# Altium PCB Motor_Driver_Model_D201.PcbDoc (part 2 of 2)
Units mil, origin at the board's own origin, x right, y up, seen from the top; angles counter-clockwise.
Board outline 1181.1 x 787.4 mil, 4 copper layers (1-SIG-TOP, 2-GND, 3-GND-PWR, 4-SIG-BOT), stack 37.795 mil thick; 50 components, 25 nets, 114 pads, 118 vias.
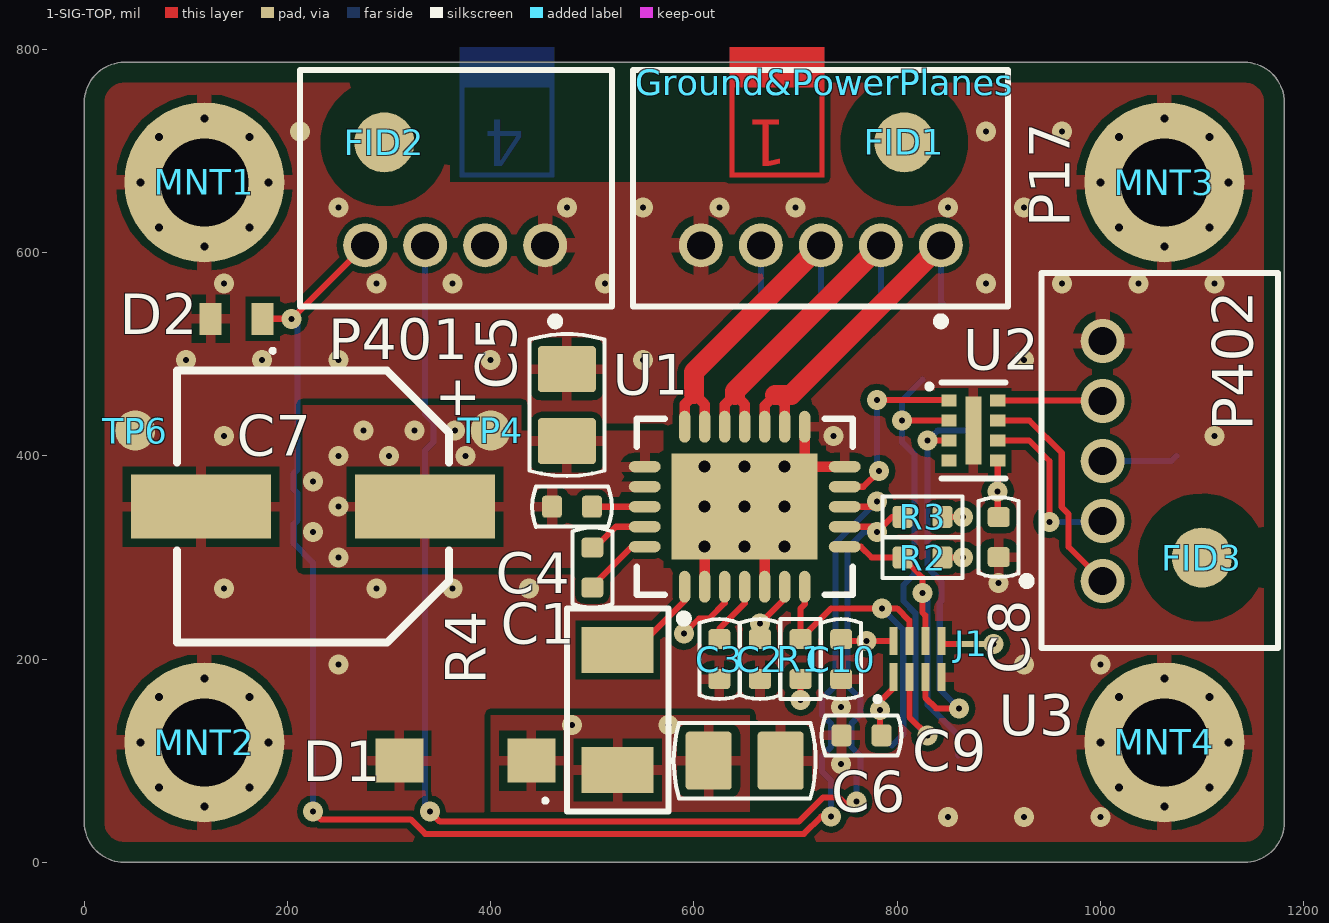
[diagram p0: 1-SIG-TOP view]

## Via types
v1: diameter 19.68, hole 5.91, 1-SIG-TOP to 4-SIG-BOT, tented both sides, 77 vias
v2: diameter 21.65, hole 7.87, 1-SIG-TOP to 4-SIG-BOT, 32 vias
v3: diameter 23.81, hole 11.81, 1-SIG-TOP to 4-SIG-BOT, tented both sides, 9 vias

## Nets (pads, with @x,y where several pads share a name; then routed paths per layer and width w, separated by ;. In a path a pad name is that pad's centre, name@x,y a point inside that pad or via, vN(x,y) a via of type N, cw(c..) or ccw(c..) an arc to the next point about the centre after c; other vN are vias at no path point) (continued)
SPEED: (continued)
  1-SIG-TOP w6: D2.1 v1(204.09,535) P401.4 ; v1(225,50) 232.8,42.2 321.16,42.2 335.35,28 708.32,28 725.32,45 v1(735,45) ; U1.10 775,350 v1(780,355)
  4-SIG-BOT w6: v1(204.09,535) 210,529.09 210,386.65 206.16,382.8 206.16,367.2 210,363.35 210,336.65 206.16,332.8 206.16,313.84 225,295 v1(225,50) ; v1(735,45) 735,80.35 726.16,89.2 726.16,104.8 735,113.65 735,136.35 726.16,145.2 726.16,160.8 739.16,173.8 739.16,314.16 v1(780,355)
VCCA: C8.2 C9.1 J1.1 P402.3 TP2.1 U2.5 U3.1 | length 214.4
  1-SIG-TOP w6: C9.1 780,129.68 783,132.68 v1(783,150) 783,152 780,155 796.38,171.38 U3.1 ; J1.1 v1(895,215) ; U2.5 v1(899.02,365) 899.02,340.67 C8.2
  4-SIG-BOT w6: P402.3 1070,395 TP2.1
VSYS: C4.2 C5.1 C7.1 P401.2 TP4.1 U1.20 U1.21
  other v1: 250,300 225,325 250,350 225,375 250,400 300,400 375,400 275,425 325,425 365,425
pads on no net: FID1. FID2. FID3. U2.4

## Polygon pours and split planes (outlines as drawn)
GND on 1-SIG-TOP "GND_L01_P135" (solid, remove dead copper, pour order 135): 0,787.4 1181.1,787.4 1181.1,0 0,0
VSYS on 1-SIG-TOP "VSYS_L01_P133" (solid, pour order 133): 570,360 480,360 480,290 215,290 215,450 430,450 430,425 570,425
DRV_TP.VREG on 1-SIG-TOP "DRV_TP.VREG_L01_P131" (solid, pour order 131): 400,145 400,50 655,50 655,145
GND on 4-SIG-BOT "GND_L04_P137" (solid, remove dead copper, pour order 137): 0,787.4 1181.1,787.4 1181.1,0 0,0
GND on 2-GND (split plane): 1145.51,767.02 1149.14,765.92 1152.49,764.13 1155.42,761.72 1157.83,758.79 1159.62,755.44 1160.72,751.81 1161.05,748.49 1161.01,748.03 1161.01,39.37 1161.05,38.91 1160.72,35.59 1159.62,31.96 1157.83,28.61 1155.42,25.68 1152.49,23.27 1149.14,21.48 1145.51,20.38 1142.19,20.05 1141.73,20.1 39.37,20.1 38.91,20.05 35.59,20.38 31.96,21.48 28.61,23.27 25.68,25.68 23.27,28.61 21.48,31.96 20.38,35.59 20.05,38.91 20.1,39.37 20.1,748.03 20.05,748.49 20.38,751.81 21.48,755.44 23.27,758.79 25.68,761.72 28.61,764.13 31.96,765.92 35.59,767.02 38.91,767.35 39.37,767.3 369.49,767.3 369.49,669.29 639.76,669.29 644.69,669.29 733.27,669.29 733.27,767.3 1141.73,767.3 1142.19,767.35
GND on 2-GND (split plane): 639.76,674.21 546.26,674.21 546.26,767.3 639.76,767.3
GND on 3-GND-PWR (split plane): 1145.51,767.02 1149.14,765.92 1152.49,764.13 1155.42,761.72 1157.83,758.79 1159.62,755.44 1160.72,751.81 1161.05,748.49 1161.01,748.03 1161.01,39.37 1161.05,38.91 1160.72,35.59 1159.62,31.96 1157.83,28.61 1155.42,25.68 1152.49,23.27 1149.14,21.48 1145.51,20.38 1142.19,20.05 1141.73,20.1 39.37,20.1 38.91,20.05 35.59,20.38 31.96,21.48 28.61,23.27 25.68,25.68 23.27,28.61 21.48,31.96 20.38,35.59 20.05,38.91 20.1,39.37 20.1,748.03 20.05,748.49 20.38,751.81 21.48,755.44 23.27,758.79 25.68,761.72 28.61,764.13 31.96,765.92 35.59,767.02 38.91,767.35 39.37,767.3 369.49,767.3 369.49,669.29 457.68,669.29 551.18,669.29 556.1,669.29 639.76,669.29 644.69,669.29 733.27,669.29 733.27,767.3 1141.73,767.3 1142.19,767.35
VSYS on 3-GND-PWR (split plane): 420.92,304.08 229.08,304.08 229.08,445.92 355,445.92 356.56,446.23 357.88,447.12 358.77,448.44 359.08,450 359.08,645.92 420.92,645.92
DRV_TP.VREG on 3-GND-PWR (split plane): 645.92,150 645.92,79.08 379.08,79.08 379.08,245.92 645.92,245.92
VCCA on 3-GND-PWR (split plane): 1035.92,364.08 950,364.08 948.44,363.77 947.12,362.88 946.23,361.56 945.92,360 945.92,104.08 776.69,104.08 730.77,150 751.69,170.92 875,170.92 876.56,171.23 877.88,172.12 878.77,173.44 879.08,175 879.08,250 879.08,350 879.08,425.92 1035.92,425.92
GND on 3-GND-PWR (split plane): 551.18,674.21 457.68,674.21 457.68,767.3 551.18,767.3
DRV_TP.V3P3 on 3-GND-PWR (split plane): 870.92,250 870.92,179.08 750,179.08 748.44,178.77 747.12,177.88 723.31,154.08 654.08,154.08 654.08,245.92 825,245.92 826.56,246.23 827.88,247.12 828.77,248.44 829.08,250 829.08,345.92 870.92,345.92

## Keep-outs
Keep-Out Layer:
  text "'.Layer_Name'" at 3740.16,98.43 h98.43

## Other copper
1-SIG-TOP:
  text "'.Layer_Name'" at 3740.16,1870.08 h98.43
4-SIG-BOT:
  text "'.Layer_Name'" at 4330.71,1574.8 h98.43
2-GND (plane layer: these items are gaps in the copper):
  text "'.Layer_Name'" at 3740.16,1771.65 h98.43
3-GND-PWR (plane layer: these items are gaps in the copper):
  lines w8: 650,150 650,250 ; 650,150 725,150 ; 650,150 650,75 375,75 375,250 650,250 ; 650,250 825,250 825,350 875,350 ; 725,150 750,175 850,175 875,175 875,250 875,350 ; 725,150 775,100 950,100 950,360 1040,360 1040,430 875,430 875,350 ; 225,300 425,300 425,650 355,650 355,450 225,450 225,300
  text "'.Layer_Name'" at 3740.16,1673.23 h98.43

## Silkscreen, mask and mechanical layers (free items; w line width, h text height)
Top Overlay:
  text "'.Layer_Name'" at 3740.16,98.43 h98.43
Bottom Overlay:
  text "'.Layer_Name'" at 4330.71,0 h98.43
Top Paste:
  text "'.Layer_Name'" at 3740.16,688.98 h98.43
Bottom Paste:
  text "'.Layer_Name'" at 4330.71,590.55 h98.43
Top Solder:
  text "'.Layer_Name'" at 3740.16,492.13 h98.43
Bottom Solder:
  text "'.Layer_Name'" at 4330.71,393.7 h98.43
Drill Guide:
  text "'.Layer_Name'" at 3740.16,196.85 h98.43
Dimensions:
  text "'.Layer_Name'" at 3740.16,1377.95 h98.43
Fiducials:
  text "'.Layer_Name'" at 3740.16,1279.53 h98.43
Outline:
  the board outline again, w39.37
  text "'.Layer_Name'" at 3740.16,1181.1 h98.43
3D Body TOP:
  text "'.Layer_Name'" at 3740.16,1082.68 h98.43
TOP ASSY:
  text "'.Layer_Name'" at 3740.16,688.98 h98.43
Courtyard TOP:
  text "'.Layer_Name'" at 3740.16,984.25 h98.43
PCB Sheet:
  lines w27.56: -2396.85,-8984.25 -2396.85,2708.66 ; -2396.85,-6061.02 -2200,-6061.02 ; -2396.85,-3137.8 -2200,-3137.8 ; -2396.85,-214.57 -2200,-214.57 ; -2200,-7579.25 382.95,-7579.25 1882.95,-7579.25 4886.61,-7579.25 ; -699.72,-8787.4 -699.72,-7579.25 ; -699.72,-8479.25 4886.61,-8479.25 ; -699.72,-8179.25 4886.61,-8179.25 ; -699.72,-7879.25 4886.61,-7879.25 ; 164.96,-8984.25 164.96,-8787.4 ; 164.96,2511.81 164.96,2708.66 ; 1482.95,-8787.4 1482.95,-8179.25 1482.95,-7579.25 ; 2524.41,-8984.25 2524.41,-8787.4 ; 2524.41,2511.81 2524.41,2708.66 ; 3582.95,-8787.4 3582.95,-8179.25 ; 4886.61,-6061.02 5083.46,-6061.02 ; 4886.61,-3137.8 5083.46,-3137.8 ; 4886.61,-214.57 5083.46,-214.57 ; -3184.25,-8984.25 5083.46,-8984.25 5083.46,2708.66 -3184.25,2708.66 -3184.25,-8984.25 ; -2200,-8787.4 -2200,2511.81 4886.61,2511.81 4886.61,-8787.4 -2200,-8787.4
  text "1" at -1018.9,2570.87 h70
  text "2" at 1343.31,2570.87 h70
  text "3" at 3705.51,2570.87 h70
  text "A" at -2318.11,1148.62 h70
  text "A" at 4965.35,1148.62 h70
  text "'.Layer_Name'" at 3740.16,885.83 h98.43
  text "B" at -2318.11,-1774.61 h70
  text "B" at 4965.35,-1774.61 h70
  text "C" at -2318.11,-4697.83 h70
  text "C" at 4965.35,-4697.83 h70
  text "D" at -2318.11,-7542.32 h70
  text "D" at 4965.35,-7542.32 h70
  text "ENGINEER:" at -649.72,-7679.25 h45
  text "PROJECT NAME:" at 1532.95,-7679.25 h45
  text "'.ProjectName'" at 2075.2,-7803.15 h118.11
  text "'._HWEngineer'" at -554.76,-7812.78 h60
  text "PCB DESIGNER:" at -649.72,-7974.25 h45
  text "BOARD NAME:" at 1532.95,-7974.53 h45
  text "'._CompanyName'" at -2003.15,-8039.37 h70
  text "'._BoardName'" at 2075.2,-8108.27 h118.11
  text "'._HWEngineer'" at -559.76,-8117.78 h60
  text "'._address1'" at -2003.15,-8236.22 h70
  text "DATE:" at -649.72,-8279.25 h45
  text "PART NO.:" at 1532.95,-8279.25 h45
  text "Ver:" at 3632.95,-8279.25 h45
  text "'._address2'" at -2003.15,-8334.65 h70
  text "'._Revision'" at 3990.75,-8384.25 h118.11
  text "'._DocumentDate'" at -559.76,-8387.78 h70
  text "'._PCBModel'" at 2075.2,-8413.39 h118.11
  text "'._address3'" at -2003.15,-8433.07 h50
  text "'._address4'" at -2003.15,-8531.5 h50
  text "FILE NAME:" at -649.72,-8579.25 h45
  text "SCH. NO.:" at 1532.95,-8579.25 h45
  text "SCALE:" at 3632.95,-8579.25 h45
  text "A4 M1:1" at 4015.75,-8684.25 h118.11
  text "'.ProjectNumber'" at 2075.2,-8708.66 h118.11
  text "'.Pcb_File_Name_No_Path'" at -557.24,-8714.12 h70
  text "1" at -1018.9,-8925.2 h70
  text "2" at 1343.31,-8925.2 h70
  text "3" at 3705.51,-8925.2 h70
Drill Drawing:
  text "'.Layer_Name'" at 3740.16,-98.43 h98.43
  text ".Legend" at -2066.93,-7283.46 h137.8
Courtyard BOT:
  text "'.Layer_Name'" at 4330.71,787.4 h98.43
BOT ASSY:
  text "'.Layer_Name'" at 4330.71,295.28 h98.43
Layer Stack:
  drawing of 458 lines, arcs and shapes, not listed
  text "'.Layer_Name'" at 3740.16,-216.54 h98.43
  text "Layer" at -40.61,-1649.62 h60
  text "Name" at 369.3,-1649.62 h60
  text "Material" at 1299.05,-1649.62 h60
  text "Thickness" at 2158.82,-1649.62 h60
  text "Constant" at 2808.65,-1649.62 h60
  text "Board Layer Stack" at 3378.51,-1649.62 h60
  text "Top Overlay" at 369.3,-1769.62 h60
  text "Top Solder" at 369.3,-1889.62 h60
  text "Solder Resist" at 1299.05,-1889.62 h60
  text "0.010mm" at 2158.82,-1889.62 h60
  text "3.5" at 2808.65,-1889.62 h60
  text "1" at -40.61,-2009.62 h60
  text "1-SIG-TOP" at 369.3,-2009.62 h60
  text "Copper" at 1299.05,-2009.62 h60
  text "0.035mm" at 2158.82,-2009.62 h60
  text "Dielectric 1" at 369.3,-2129.62 h60
  text "FR-4" at 1299.05,-2129.62 h60
  text "0.110mm" at 2158.82,-2129.62 h60
  text "4.29" at 2808.65,-2129.62 h60
  text "2" at -40.61,-2249.62 h60
  text "2-GND" at 369.3,-2249.62 h60
  text "Copper" at 1299.05,-2249.62 h60
  text "0.035mm" at 2158.82,-2249.62 h60
  text "Dielectric 3" at 369.3,-2369.62 h60
  text "0.600mm" at 2158.82,-2369.62 h60
  text "4.2" at 2808.65,-2369.62 h60
  text "3" at -40.61,-2489.62 h60
  text "3-GND-PWR" at 369.3,-2489.62 h60
  text "Copper" at 1299.05,-2489.62 h60
  text "0.035mm" at 2158.82,-2489.62 h60
  text "Dielectric 2" at 369.3,-2609.62 h60
  text "0.110mm" at 2158.82,-2609.62 h60
  text "4.29" at 2808.65,-2609.62 h60
  text "4" at -40.61,-2729.62 h60
  text "4-SIG-BOT" at 369.3,-2729.62 h60
  text "Copper" at 1299.05,-2729.62 h60
  text "0.035mm" at 2158.82,-2729.62 h60
  text "Bottom Solder" at 369.3,-2849.62 h60
  text "Solder Resist" at 1299.05,-2849.62 h60
  text "0.010mm" at 2158.82,-2849.62 h60
  text "3.5" at 2808.65,-2849.62 h60
  text "Bottom Overlay" at 369.3,-2969.62 h60

## Dimensions
39.37,0 to 118.11,118.11 on Dimensions
0,39.37 to 118.11,118.11 on Dimensions
1141.73,0 to 1062.99,118.11 on Dimensions
0,748.03 to 295.28,708.66 on Fiducials
0,39.37 to 1100,300 on Fiducials
1141.73,0 to 1100,300 on Fiducials
39.37,0 to 295.28,708.66 on Fiducials

## Text inside footprints (layer, text, board x,y; h text height)
C7: Top Overlay "+" at 345,440 h40; TOP ASSY "+" at 310,330 h40
Ground&PowerPlanes: 1-SIG-TOP "1" at 691.93,746.06 h78.74 r180
Ground&PowerPlanes: 4-SIG-BOT "4" at 433.35,746.06 h78.74 r180
Ground&PowerPlanes: 3-GND-PWR "3" at 517.59,745.98 h78.74 r180; 3-GND-PWR "3" at 517.59,745.98 h78.74 r180
Ground&PowerPlanes: 2-GND "2" at 607.28,746.06 h78.74 r180; 2-GND "2" at 607.28,746.06 h78.74 r180
Logo1: Bottom Overlay "CPU" at 87.2,275 h98.43 r270; Bottom Overlay "Acme" at 228.94,78.15 h98.43 r270
P17: TOP ASSY "5" at 595,635 h40; TOP ASSY "4" at 650,635 h40; TOP ASSY "3" at 710,635 h40; TOP ASSY "2" at 770,635 h40; TOP ASSY "1" at 840,635 h40
P401: TOP ASSY "4" at 260,635 h40; TOP ASSY "3" at 320,635 h40; TOP ASSY "2" at 380,635 h40; TOP ASSY "1" at 445,635 h40
P402: TOP ASSY "5" at 1075,500 h40 r90; TOP ASSY "4" at 1075,445 h40 r90; TOP ASSY "3" at 1075,385 h40 r90; TOP ASSY "2" at 1075,325 h40 r90; TOP ASSY "1" at 1075,270 h40 r90